# EAGLE board untitled (EAGLE 9.5.0)
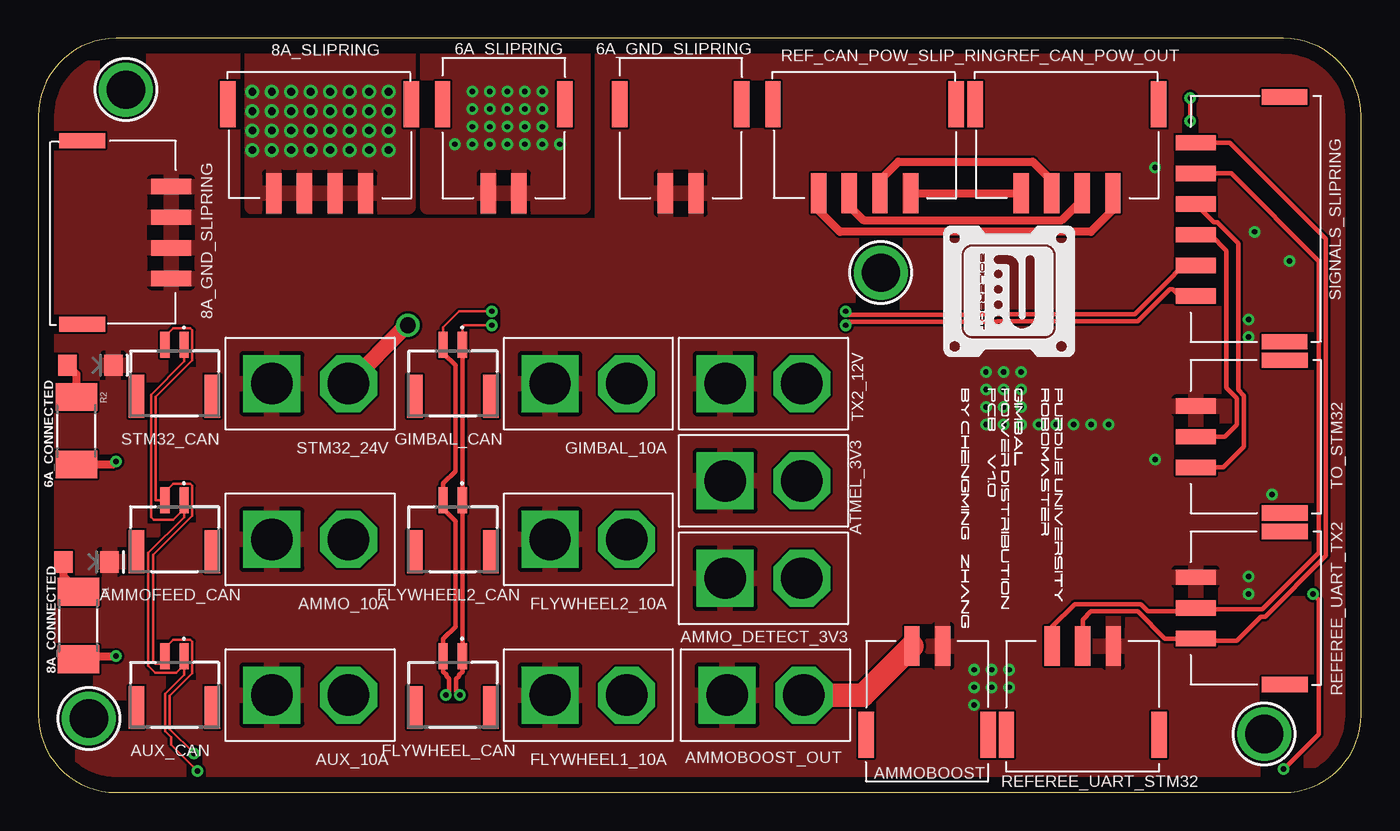
[diagram p0: board, top side]
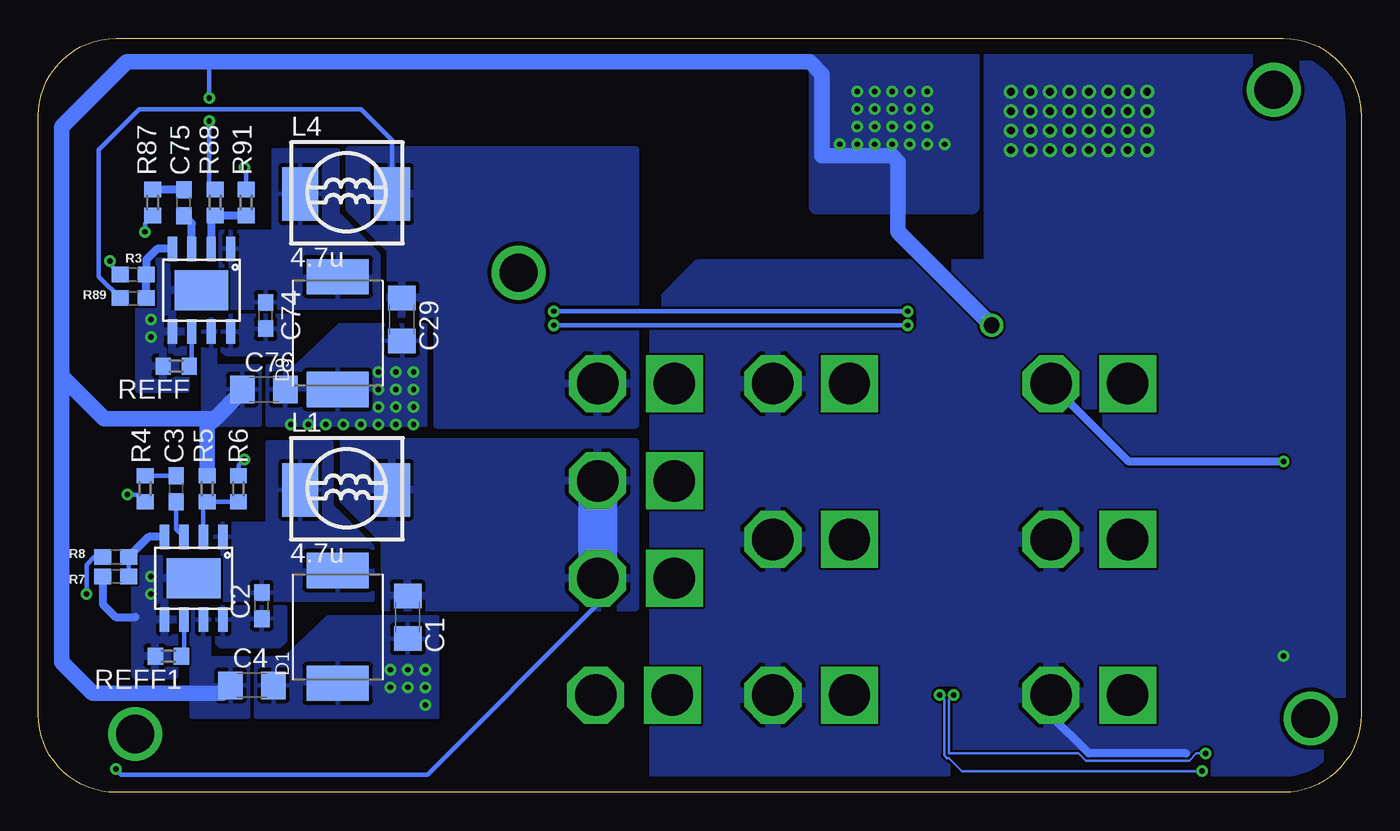
[diagram p1: board, bottom side, seen from below]

Size 86.34 x 49.2 mm. Coordinates in mm from the lower left corner, seen from the top.
Outline: 81.26,49.2 5.08,49.2 arc90 0,44.12 0,5.08 arc90 5.08,0 81.26,0 arc90 86.34,5.08 86.34,44.12 arc90 81.26,49.2
Copper layers (1*16): Top 0.035mm / dielectric 1.5mm / Bottom 0.035mm
Design rules "default *": minimum track width 6mil, minimum drill 0.35mm, track to track 6mil, track to pad 6mil, pad to pad 6mil, via to via 6mil, smd to smd 6mil, copper to edge 40mil, drill to drill 6mil, minimum pad ring 10mil, minimum via ring 8mil, stop-mask expansion 4mil, vias tented up to drill 40mil, thermal gap 10mil
Net classes: 1 sig: width 0.254 mm, drill 0.305 mm, clearance 0.127 mm; 2 Power: width 0.203 mm, drill 0.203 mm, clearance 0.203 mm

## Footprints (pad centres in the part's own frame; a part is rotated, then mirrored left to right if it is on the bottom)
LED-1206 = smd 1.2 x 1.4: A -1.5,0; C 1.5,0
S2B-PH-SM4_TB = smd 1 x 2.6: 1 3.81,8.28; 2 5.81,8.28 | smd 1 x 3: GND 0.826,2.48; GND2 8.787,2.48
S4B-PH-SM4_TB = smd 1 x 2.6: 1 3.27,7.9; 2 5.27,7.9; 3 7.27,7.9; 4 9.27,7.9 | smd 1 x 3: GND 0.286,2.1; GND2 12.254,2.1
XT30 = drill 2.7 square: P$1 0,0 | drill 2.7 octagon: P$2 5,0
BM02B-GHS-TBT_1 = smd 0.6 x 1.7: 1 0.625,0; 2 -0.625,0 | smd 1 x 2.8: 3 -2.475,-3.35; 4 2.475,-3.35
C1206 = smd 1.6 x 1.8: 1 -1.4,0; 2 1.4,0
C0603 = smd 1.1 x 1: 1 -0.85,0; 2 0.85,0
DO-214AB = smd 2.286 x 4.064: 1 -3.683,0; 2 3.683,0
MHCI0603-4R7M-R8 = smd 2.35 x 3.5: P$1 0.6,3.23; P$2 6.6,3.23
R2010 = smd 1.8 x 2.7: 1 -2.2,0; 2 2.2,0
0603 = smd 1.1 x 1: 1 -0.85,0; 2 0.85,0
R0603 = smd 1 x 1.1: 1 -0.85,0; 2 0.85,0
S3B-PH-SM4_TB = smd 1 x 2.6: 1 3.81,8.28; 2 5.81,8.28; 3 7.81,8.28 | smd 1 x 3: GND 0.826,2.48; GND2 10.794,2.48
S6B-PH-SM4_TB = smd 1 x 2.6: 1 5.46,9.68; 2 7.46,9.68; 3 9.46,9.68; 4 11.46,9.68; 5 13.46,9.68; 6 15.46,9.68 | smd 1 x 3: GND 2.476,3.88; GND2 18.444,3.88
MOUNTINGHOLE_2.5_PLATED = drill 2.5 pad 3.2: P$1 0,0
MP1584_V2 = smd 1.6 x 0.61: BST 2.7,1.905; COMP -2.7,-0.635; EN -2.7,0.635; FB -2.7,-1.905; FREQ 2.7,-0.635; GND 2.7,-1.905; SW -2.7,1.905; VIN 2.7,0.635 | smd 2.62 x 3.51: GND_B 0,0

## Placement (x,y rotation side)
6A_CONNECTED  3V 20mA  [LED-1206]  3.4,27.87 0 top
6A_GND_SLIPRING  S2B-PH-SM4_TB  [S2B-PH-SM4_TB]  46.74,47.37 180 top
6A_SLIPRING  S2B-PH-SM4_TB  [S2B-PH-SM4_TB]  35.18,47.37 180 top
8A_CONNECTED  3V 20mA  [LED-1206]  3.14,15.04 0 top
8A_GND_SLIPRING  S4B-PH-SM4_TB  [S4B-PH-SM4_TB]  0.76,42.8 270 top
8A_SLIPRING  S4B-PH-SM4_TB  [S4B-PH-SM4_TB]  24.64,46.99 180 top
AMMO_10A  XT30  [XT30]  15.24,16.51 0 top
AMMO_DETECT_3V3  XT30  [XT30]  44.83,13.97 0 top
AMMOBOOST  S2B-PH-SM4_TB  [S2B-PH-SM4_TB]  53.21,1.27 0 top
AMMOBOOST_OUT  XT30  [XT30]  44.96,6.35 0 top
AMMOFEED_CAN  BM02B-GHS-TBT(LF)(SN)  [BM02B-GHS-TBT_1]  8.89,19.05 0 top
ATMEL_3V3  XT30  [XT30]  44.83,20.32 0 top
AUX_10A  XT30  [XT30]  15.24,6.35 0 top
AUX_CAN  BM02B-GHS-TBT(LF)(SN)  [BM02B-GHS-TBT_1]  8.89,8.89 0 top
C1  22u  [C1206]  62.23,11.43 270 bottom
C2  0.1u  [C0603]  71.75,12.19 90 bottom
C3  150p  [C0603]  77.34,19.81 90 bottom
C4  10u  [C1206]  72.39,6.99 0 bottom
C29  22u  [C1206]  62.61,30.86 270 bottom
C74  0.1u  [C0603]  71.5,31.11 90 bottom
C75  150p  [C0603]  76.83,38.48 90 bottom
C76  10u  [C1206]  71.63,26.29 0 bottom
D1  SMD-DIODE-SCHOTTKY-40V-3A(DO-214AB)  [DO-214AB]  66.8,10.79 90 bottom
D9  SMD-DIODE-SCHOTTKY-40V-3A(DO-214AB)  [DO-214AB]  66.8,29.97 90 bottom
FLYWHEEL1_10A  XT30  [XT30]  33.4,6.35 0 top
FLYWHEEL2_10A  XT30  [XT30]  33.4,16.51 0 top
FLYWHEEL2_CAN  BM02B-GHS-TBT(LF)(SN)  [BM02B-GHS-TBT_1]  27.05,19.05 0 top
FLYWHEEL_CAN  BM02B-GHS-TBT(LF)(SN)  [BM02B-GHS-TBT_1]  27.05,8.89 0 top
GIMBAL_10A  XT30  [XT30]  33.4,26.67 0 top
GIMBAL_CAN  BM02B-GHS-TBT(LF)(SN)  [BM02B-GHS-TBT_1]  27.05,29.21 0 top
L1  4.7u  [MHCI0603-4R7M-R8]  69.85,16.51 0 bottom
L4  4.7u  [MHCI0603-4R7M-R8]  69.85,35.81 0 bottom
R1  1.2K  [R2010]  2.61,10.89 270 top
R2  1.2K  [R2010]  2.48,23.59 270 top
R3  40.2K  [0603]  80.14,33.78 0 bottom
R4  100k  [R0603]  79.38,19.81 90 bottom
R5  100k  [R0603]  75.31,19.81 90 bottom
R6  24k  [R0603]  73.28,19.81 270 bottom
R7  40.2K  [0603]  81.28,14.1 0 bottom
R8  125K  [0603]  81.28,15.37 180 bottom
R87  100k  [R0603]  78.87,38.48 90 bottom
R88  100k  [R0603]  74.8,38.48 90 bottom
R89  560k  [0603]  80.14,32.26 180 bottom
R91  24k  [R0603]  72.77,38.48 270 bottom
REF_CAN_POW_OUT  S4B-PH-SM4_TB  [S4B-PH-SM4_TB]  73.41,46.99 180 top
REF_CAN_POW_SLIP_RING  S4B-PH-SM4_TB  [S4B-PH-SM4_TB]  60.2,46.99 180 top
REFEREE_UART_STM32  S3B-PH-SM4_TB  [S3B-PH-SM4_TB]  62.36,1.27 0 top
REFEREE_UART_TX2  S3B-PH-SM4_TB  [S3B-PH-SM4_TB]  83.82,6.22 90 top
REFF  100k  [R0603]  77.34,27.81 180 bottom
REFF1  100k  [R0603]  77.85,8.89 180 bottom
SIGNALS_SLIPRING  S6B-PH-SM4_TB  [S6B-PH-SM4_TB]  85.22,26.92 90 top
STM32_24V  XT30  [XT30]  15.24,26.67 0 top
STM32_CAN  BM02B-GHS-TBT(LF)(SN)  [BM02B-GHS-TBT_1]  8.89,29.21 0 top
TO_STM32  S3B-PH-SM4_TB  [S3B-PH-SM4_TB]  83.82,17.4 90 top
TX2_12V  XT30  [XT30]  44.83,26.67 0 top
U$1  MOUNTINGHOLE2.5  [MOUNTINGHOLE_2.5_PLATED]  80.01,3.81 0 top
U$2  MOUNTINGHOLE2.5  [MOUNTINGHOLE_2.5_PLATED]  54.99,33.91 0 top
U$3  MP1584_V2  [MP1584_V2]  75.69,32.77 270 bottom
U$4  MOUNTINGHOLE2.5  [MOUNTINGHOLE_2.5_PLATED]  5.71,45.85 0 top
U$5  MP1584_V2  [MP1584_V2]  76.2,13.97 270 bottom
U$49  MOUNTINGHOLE2.5  [MOUNTINGHOLE_2.5_PLATED]  3.3,4.83 0 top

## Library data of the parts
6A_CONNECTED 8A_CONNECTED = SparkFun-LED
6A_GND_SLIPRING 6A_SLIPRING 8A_GND_SLIPRING 8A_SLIPRING AMMO_10A AMMO_DETECT_3V3 AMMOBOOST AMMOBOOST_OUT ATMEL_3V3 AUX_10A FLYWHEEL1_10A FLYWHEEL2_10A GIMBAL_10A L1 L4 REF_CAN_POW_OUT REF_CAN_POW_SLIP_RING REFEREE_UART_STM32 REFEREE_UART_TX2 SIGNALS_SLIPRING STM32_24V TO_STM32 TX2_12V = NewKevinMade
AMMOFEED_CAN AUX_CAN FLYWHEEL2_CAN FLYWHEEL_CAN GIMBAL_CAN STM32_CAN = SamacSys_Parts; DESCRIPTION: GH 1.25mm header top entry 2 way JST GH Series, 1.25mm Pitch 2 Way Shrouded Straight PCB Header, Surface Mount, Solder Termination; HEIGHT: mm; MANUFACTURER_NAME: JST (JAPAN SOLDERLESS TERMINALS); MANUFACTURER_PART_NUMBER: BM02B-GHS-TBT(LF)(SN); RS_PART_NUMBER: 7521762P
C1-C4 C29 C74-C76 R4-R6 R87 R88 R91 REFF REFF1 = adafruit
D1 D9 = SMD-DIODE-SCHOTTKY-40V-3A_DO-214AB_; AVAILABILITY: Unavailable; DESCRIPTION: Rectifier, Schottky; DO-214AB; 3.0A IF; 0.75V; 40V; 100A IFRM; 10000V/us; 1000pF; MF: Vishay; MP: SS34-E3/57T; PACKAGE: DO-214 Vishay; PRICE: None
R1 R2 = SparkFun-Passives
R3 R7 = SparkFun-Resistors; PROD_ID: RES-08969
R8 R89 = SparkFun-Resistors
U$1 U$2 U$4 U$49 = microbuilder; BOM: EXCLUDE
U$3 U$5 = mp1584S

## Nets
3V3 [Power]: AMMO_DETECT_3V3.P$2 ATMEL_3V3.P$2 C1.1 L1.P$2 R8.2
3V3EN: R5.1 R6.2 U$5.EN
6A: 6A_SLIPRING.1 6A_SLIPRING.2 C4.1 C76.1 R2.2 R5.2 R88.2 STM32_24V.P$2 U$3.VIN U$5.VIN
8A: 8A_SLIPRING.1 8A_SLIPRING.2 8A_SLIPRING.3 8A_SLIPRING.4 AMMO_10A.P$2 AUX_10A.P$2 FLYWHEEL1_10A.P$2 FLYWHEEL2_10A.P$2 GIMBAL_10A.P$2 R1.2
12V [Power]: C29.1 L4.P$2 R89.2 TX2_12V.P$2
12VEN: R88.1 R91.2 U$3.EN
AMMOBOOST: AMMOBOOST.1 AMMOBOOST_OUT.P$2
BST: C74.1 U$3.BST
BST1: C2.1 U$5.BST
CAN_N: AMMOFEED_CAN.1 AUX_CAN.1 FLYWHEEL2_CAN.1 FLYWHEEL_CAN.1 GIMBAL_CAN.1 SIGNALS_SLIPRING.1 STM32_CAN.1
CAN_P: AMMOFEED_CAN.2 AUX_CAN.2 FLYWHEEL2_CAN.2 FLYWHEEL_CAN.2 GIMBAL_CAN.2 SIGNALS_SLIPRING.2 STM32_CAN.2
COMP_3V3: C3.1 U$5.COMP
COMP_12: C75.1 U$3.COMP
DIGI: SIGNALS_SLIPRING.3 TO_STM32.2
ESP32_TX: SIGNALS_SLIPRING.4 TO_STM32.1
FB_3V3: R7.2 R8.1 U$5.FB
FB_12: R3.2 R89.1 U$3.FB
FREQ: REFF.1 U$3.FREQ
FREQ1: REFF1.1 U$5.FREQ
GND: 6A_CONNECTED.C 6A_GND_SLIPRING.1 6A_GND_SLIPRING.2 8A_CONNECTED.C 8A_GND_SLIPRING.1 8A_GND_SLIPRING.2 8A_GND_SLIPRING.3 8A_GND_SLIPRING.4 AMMO_10A.P$1 AMMO_DETECT_3V3.P$1 AMMOBOOST.2 AMMOBOOST_OUT.P$1 ATMEL_3V3.P$1 AUX_10A.P$1 C1.2 C4.2 C29.2 C76.2 D1.1 D9.1 FLYWHEEL1_10A.P$1 FLYWHEEL2_10A.P$1 GIMBAL_10A.P$1 R3.1 R4.1 R6.1 R7.1 R87.1 R91.1 REFEREE_UART_STM32.3 REFEREE_UART_TX2.3 REFF1.2 REFF.2 STM32_24V.P$1 TO_STM32.3 TX2_12V.P$1 U$3.GND U$3.GND_B U$5.GND U$5.GND_B
N$1 [sig]: 6A_CONNECTED.A R2.1
N$2 [sig]: 8A_CONNECTED.A R1.1
N$3: C3.2 R4.2
N$10: C75.2 R87.2
REF_RX: REFEREE_UART_STM32.1 REFEREE_UART_TX2.2 SIGNALS_SLIPRING.5
REF_TX: REFEREE_UART_STM32.2 REFEREE_UART_TX2.1 SIGNALS_SLIPRING.6
RF1: REF_CAN_POW_OUT.4 REF_CAN_POW_SLIP_RING.1
RF2: REF_CAN_POW_OUT.3 REF_CAN_POW_SLIP_RING.2
RF3: REF_CAN_POW_OUT.2 REF_CAN_POW_SLIP_RING.3
RF4: REF_CAN_POW_OUT.1 REF_CAN_POW_SLIP_RING.4
SW: C74.2 D9.2 L4.P$1 U$3.SW
SW1: C2.2 D1.2 L1.P$1 U$5.SW

## Tracks (layer width: path | path; a pad name or v marks a point on that pad's centre or on a via)
3V3  (via drill 0.35)
  Top 0.305: v83.19,12.95 83.57,12.57 83.57,3.81 v81.28,1.52
  Bottom 0.305: v81.28,1.52 80.92,1.17 60.93,1.17 49.83,12.27 AMMO_DETECT_3V3.P$2 | R8.2 82.68,15.37 83.19,14.86 v83.19,12.95
  Bottom 2.54: ATMEL_3V3.P$2 AMMO_DETECT_3V3.P$2
  pour Bottom: 66.42,22.86 66.42,19.05 63.75,16.38 63.75,12.06 47.37,12.06 47.37,22.86
3V3EN
  Bottom 0.305: U$5.EN 75.56,18.71 R5.1 R6.2
6A  (via drill 0.35, 1.02)
  Top 0.305: v75.18,45.31 v75.18,43.81
  Top 0.508: v5.08,21.59 4.88,21.39 R2.2
  Top 1.016: STM32_24V.P$2 24.05,30.48 v24.13,30.48
  Bottom 0.305: 75.18,47.68 v75.18,45.31 | v75.18,43.81 75.18,39.71 R88.2
  Bottom 0.508: v5.08,21.59 15.16,21.59 STM32_24V.P$2
  Bottom 1.016: 84.82,27.16 84.82,43.43 80.57,47.68 75.18,47.68 35.99,47.68 35.18,46.86 35.18,41.53 30.61,41.53 30.23,41.15 30.23,36.58 v24.13,30.48 | 84.82,27.16 82.04,24.38 74.8,24.38 | 74.8,24.38 73.03,26.16 C76.1 | R5.2 75.31,23.88 74.8,24.38 | C4.1 74.3,6.48 82.8,6.48 84.82,8.49 84.82,27.16
  other vias: 28.32,45.72 29.46,45.72 30.61,45.72 31.75,45.72 32.89,45.72 32.89,44.58 31.75,44.58 30.61,44.58 29.46,44.58 28.32,44.58 28.32,43.43 29.46,43.43 30.61,43.43 31.75,43.43 32.89,43.43 34.04,42.29 32.89,42.29 31.75,42.29 30.61,42.29 29.46,42.29 28.32,42.29 27.18,42.29
  pour Top: 25.4,52.07 25.4,38.23 35.56,38.23 35.56,52.07
  pour Bottom: 25.4,49.53 25.4,38.23 35.56,38.23 35.56,49.53
  pour Bottom: 75.18,11.81 75.18,8.76 72.64,8.76 72.64,4.95 76.33,4.95 76.33,11.81
  pour Bottom: 74.8,30.86 74.8,27.81 71.88,27.81 71.88,24 75.56,24 75.56,30.86
8A  (via drill 0.35, 0.51)
  Top 0.508: R1.2 2.81,8.89 v5.08,8.89
  Bottom 0.508: 11.43,2.54 17.78,2.54 20.24,5 AUX_10A.P$2
  other vias: 15.24,45.72 16.51,45.72 17.78,45.72 19.05,45.72 20.32,45.72 21.59,45.72 22.86,45.72 13.97,45.72 13.97,44.45 13.97,43.18 13.97,41.91 15.24,41.91 16.51,41.91 17.78,41.91 19.05,41.91 20.32,41.91 21.59,41.91 22.86,41.91 22.86,43.18 22.86,44.45 21.59,43.18 21.59,44.45 20.32,44.45 19.05,44.45 17.78,44.45 16.51,44.45 15.24,44.45 15.24,43.18 16.51,43.18 17.78,43.18 19.05,43.18 20.32,43.18
  pour Bottom: -2.54,48.26 -2.54,-1.27 45.97,-1.27 45.97,31.5 43.18,34.29 24.13,34.29 24.13,48.26
  pour Top: 13.97,49.53 13.97,38.23 24.13,38.23 24.13,49.53
12V
  Bottom 0.305: R89.2 81.66,32.93 81.68,32.93 82.39,33.64 82.39,41.94 79.76,44.58 65.28,44.58 63.25,42.55 L4.P$2
  pour Bottom: 66.04,41.91 66.04,38.1 63.37,35.43 63.37,31.24 60.33,31.24 60.33,24 47.37,24 47.37,41.91
12VEN
  Bottom 0.508: U$3.EN 75.06,37.38 R88.1 R91.2
AMMOBOOST
  Top 1.524: AMMOBOOST.1 53.82,6.35 AMMOBOOST_OUT.P$2
BST
  pour Bottom: 74.3,31.11 69.85,31.11 69.85,28.96 70.23,28.57 74.04,28.57 74.3,28.83
BST1
  pour Bottom: 74.68,12.06 70.23,12.06 70.23,9.91 70.61,9.53 74.42,9.53 74.68,9.78
CAN_N  (via drill 0.35)
  Top 0.152: SIGNALS_SLIPRING.1 74.74,32.38 74.61,32.26 | STM32_CAN.1 9.51,28.11 7.36,25.95 7.36,17.97 7.53,17.79 8.8,17.79 9.51,18.5 AMMOFEED_CAN.1 9.51,17.97 7.19,15.64 7.19,8.26 7.63,7.81 8.99,7.81 9.51,8.34 AUX_CAN.1 9.51,7.66 8.28,6.42 8.28,3.99 8.67,3.59 8.67,3.12 v10.39,1.4 | GIMBAL_CAN.1 27.68,30.36 27.79,30.48 v29.59,30.48
  Top 0.305: v52.71,30.48 52.93,30.71 62.56,30.71 62.59,30.73 71.75,30.73 73.84,32.82 74.05,32.82 74.61,32.26 | GIMBAL_CAN.1 FLYWHEEL2_CAN.1 FLYWHEEL_CAN.1 27.68,7.89 27.45,7.67 27.45,7.59 27.28,7.42 27.28,6.58 v27.5,6.35
  Bottom 0.152: v27.5,6.35 27.2,6.05 27.2,2.41 27.02,2.23 26.9,2.23 26.06,1.4 v10.39,1.4
  Bottom 0.305: v29.59,30.48 v52.71,30.48
CAN_P  (via drill 0.35)
  Top 0.152: 26.43,29.76 GIMBAL_CAN.2 26.43,30.36 27.45,31.39 v29.59,31.39 | STM32_CAN.2 8.27,29.76 8.79,30.29 9.91,30.29 10.04,30.16 10.04,28.21 7.66,25.83 7.66,19.05 AMMOFEED_CAN.2 8.27,19.6 8.79,20.13 9.91,20.13 10.04,20 10.04,18.07 7.49,15.51 7.49,8.53 7.63,8.39 8.21,8.39 8.27,8.45 AUX_CAN.2 8.27,9.44 8.79,9.97 9.91,9.97 10.04,9.84 10.04,7.76 8.58,6.3 8.58,4.12 v10.16,2.54 | 74.74,34.38 SIGNALS_SLIPRING.2
  Top 0.305: v52.71,31.39 52.93,31.16 61.47,31.16 61.5,31.19 71.56,31.19 73.51,33.14 73.51,33.16 74.74,34.38 | GIMBAL_CAN.2 26.43,28.66 27.22,27.87 27.22,20.97 26.43,20.17 FLYWHEEL2_CAN.2 26.43,18.5 27.22,17.71 27.22,10.81 26.43,10.01 FLYWHEEL_CAN.2 26.43,7.89 26.65,7.67 26.65,7.59 26.82,7.42 26.82,6.58 v26.6,6.35
  Bottom 0.152: v26.6,6.35 26.9,6.05 26.9,2.54 18.46,2.54 17.98,2.06 11.23,2.06 10.75,2.54 v10.16,2.54
  Bottom 0.305: v29.59,31.39 v52.71,31.39
COMP_3V3
  Bottom 0.305: C3.1 77.34,17.18 U$5.COMP
COMP_12
  Bottom 0.508: U$3.COMP 76.33,37.12 C75.1
DIGI
  Top 0.305: TO_STM32.2 77.44,23.21 78.23,24 78.23,25.7 77.55,26.39 77.55,35.35 76.52,36.38 SIGNALS_SLIPRING.3
ESP32_TX
  Top 0.305: SIGNALS_SLIPRING.4 76.73,37.19 76.96,37.19 78.31,35.84 78.31,26.27 78.69,25.89 78.69,22.55 77.34,21.21 TO_STM32.1
FB_3V3
  Bottom 0.305: R7.2 R8.1
  Bottom 0.508: U$5.FB 79.13,16.67 R8.1
FB_12
  Bottom 0.508: R89.1 R3.2 79.29,34.76 78.58,35.47 U$3.FB
FREQ
  Bottom 0.305: REFF.1 76.33,27.98 U$3.FREQ
FREQ1
  Bottom 0.305: U$5.FREQ 76.83,9.06 REFF1.1
GND  (via drill 0.35)
  Bottom 0.305: R91.1 72.77,40.64 v72.9,40.77 | R87.1 79.38,37.12 v79.38,36.58 | R3.1 81.66,34.46 v81.66,34.67 | R6.1 73.28,21.34 v72.9,21.72 | R4.1 79.84,19.43 v80.52,19.43
  Bottom 0.508: R7.1 82.13,12.28 81.28,11.43 80.01,11.43
  other vias: 61.09,8 62.23,8 63.37,8 63.37,6.86 62.23,6.86 61.09,6.86 61.09,5.71 78.99,12.95 78.99,14.1 78.99,30.86 78.99,29.72 61.85,27.43 61.85,26.29 61.85,25.15 62.99,25.15 62.99,26.29 62.99,27.43 64.14,27.43 64.14,26.29 64.14,25.15 61.85,24 62.99,24 64.14,24 65.28,24 66.42,24 67.56,24 68.71,24 69.85,24
  pour Top: 0,50.8 0,0 86.36,0 86.36,50.8 36.83,50.8 36.83,36.96 12.7,36.96 12.7,50.8
  pour Bottom: 77.47,15.24 77.47,7.62 80.01,7.62 80.01,15.24
  pour Bottom: 60.33,11.43 67.44,11.43 70.23,8.76 72.14,8.76 72.14,4.95 60.33,4.95
  pour Bottom: 76.71,34.67 76.71,26.29 79.76,26.29 79.76,34.67
  pour Bottom: 61.09,30.48 66.67,30.48 69.47,27.81 71.37,27.81 71.37,24 61.09,24
N$1
  Top 0.508: 6A_CONNECTED.A 2.48,27.28 R2.1
N$2
  Top 0.508: R1.1 1.65,14.06 8A_CONNECTED.A
N$3
  Bottom 0.305: C3.2 R4.2
N$10
  Bottom 0.508: C75.2 R87.2
REF_RX
  Top 0.305: REFEREE_UART_STM32.1 66.17,10.79 67.64,12.27 71.94,12.27 72.4,11.81 75.32,11.81 75.44,11.93 | 75.44,11.93 REFEREE_UART_TX2.2 | SIGNALS_SLIPRING.5 77.85,40.38 83.57,34.67 83.57,15.62 79.88,11.93 75.44,11.93
REF_TX
  Top 0.305: REFEREE_UART_STM32.2 68.17,11.27 68.71,11.81 71.75,11.81 73.53,10.03 REFEREE_UART_TX2.1 75.67,9.91 78.23,9.91 79.8,11.48 80.07,11.48 84.02,15.43 84.02,36.12 77.76,42.38 SIGNALS_SLIPRING.6
RF1
  Top 0.508: REF_CAN_POW_SLIP_RING.1 REF_CAN_POW_OUT.4
RF2
  Top 0.508: REF_CAN_POW_SLIP_RING.2 54.93,39.94 56.13,41.15 64.9,41.15 66.14,39.91 REF_CAN_POW_OUT.3
RF3
  Top 0.508: REF_CAN_POW_SLIP_RING.3 52.93,38.26 53.85,37.34 66.8,37.34 68.14,38.67 REF_CAN_POW_OUT.2
RF4
  Top 0.508: REF_CAN_POW_SLIP_RING.4 50.93,37.97 52.32,36.58 68.71,36.58 70.14,38.01 REF_CAN_POW_OUT.1
SW
  pour Bottom: 64.14,35.05 64.14,31.62 74.42,31.62 74.42,36.58 70.99,36.58 70.99,41.91 66.8,41.91 66.8,37.72
SW1
  pour Bottom: 64.52,16 64.52,12.57 74.8,12.57 74.8,17.53 71.37,17.53 71.37,22.86 67.18,22.86 67.18,18.67

## Text on the board
tPlace: /Users/ChengMing/Desktop/The offical logo.bmp